# EAGLE board FRI6FC1IN365URC (EAGLE 7.5.0)
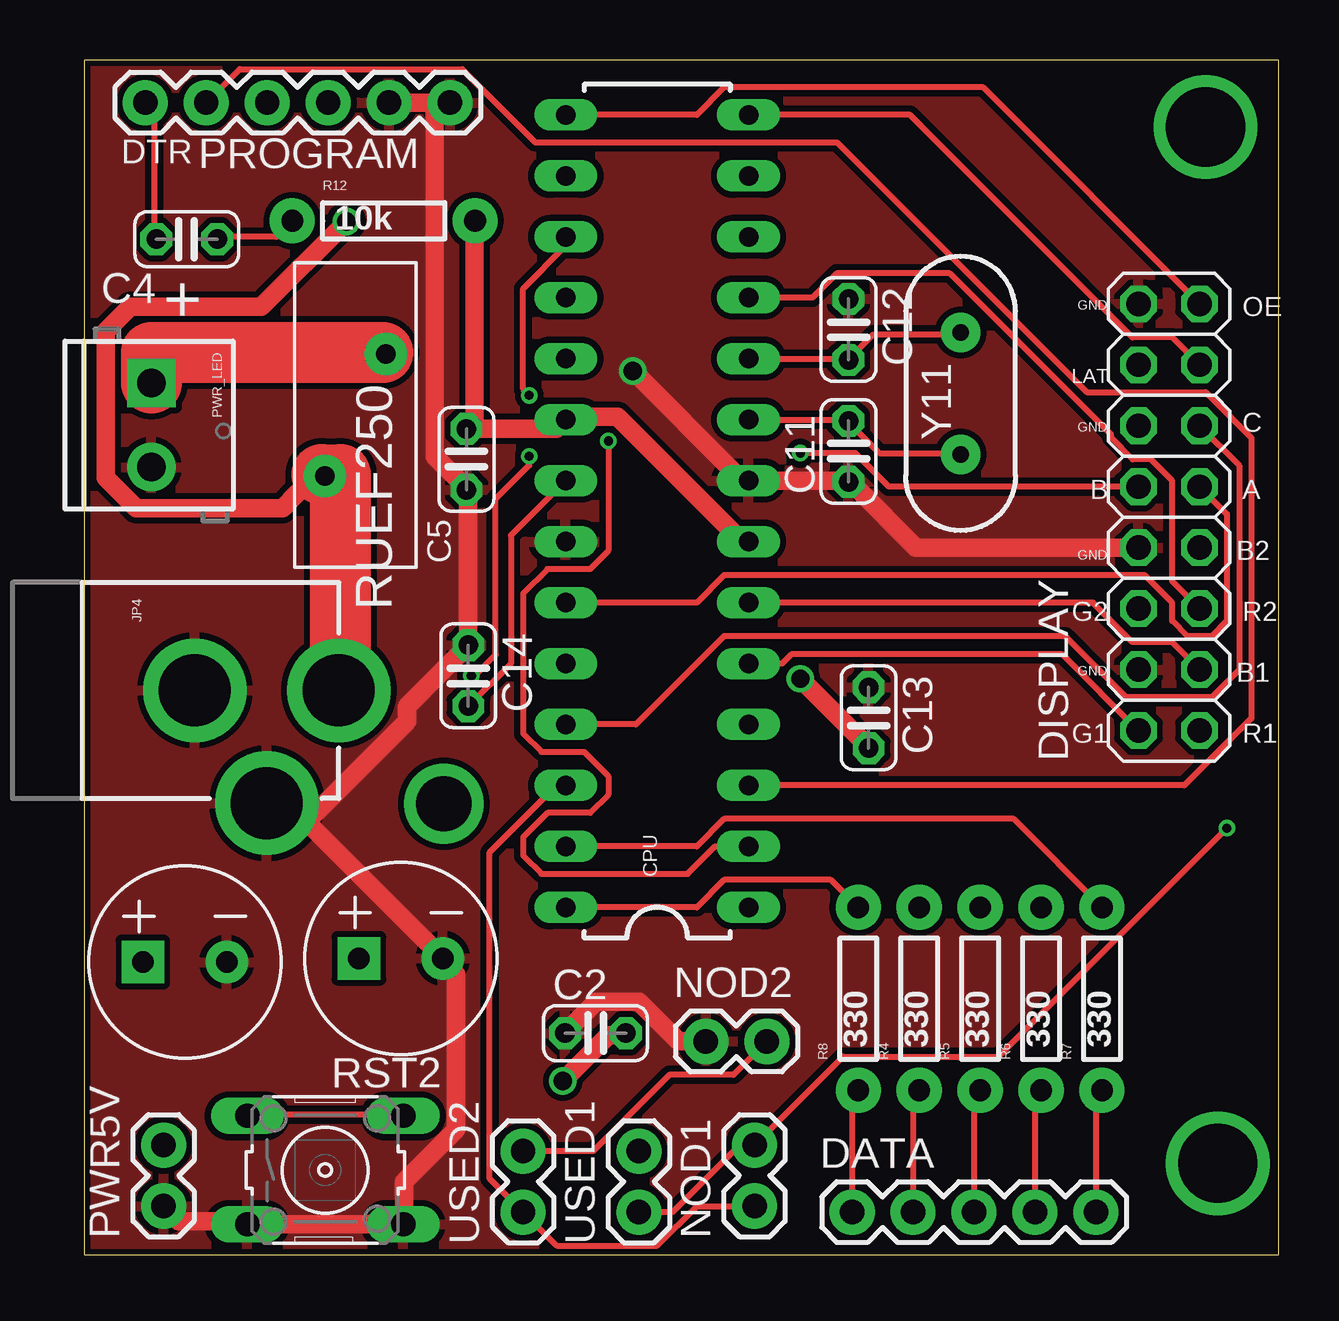
[diagram p0: board, top side]
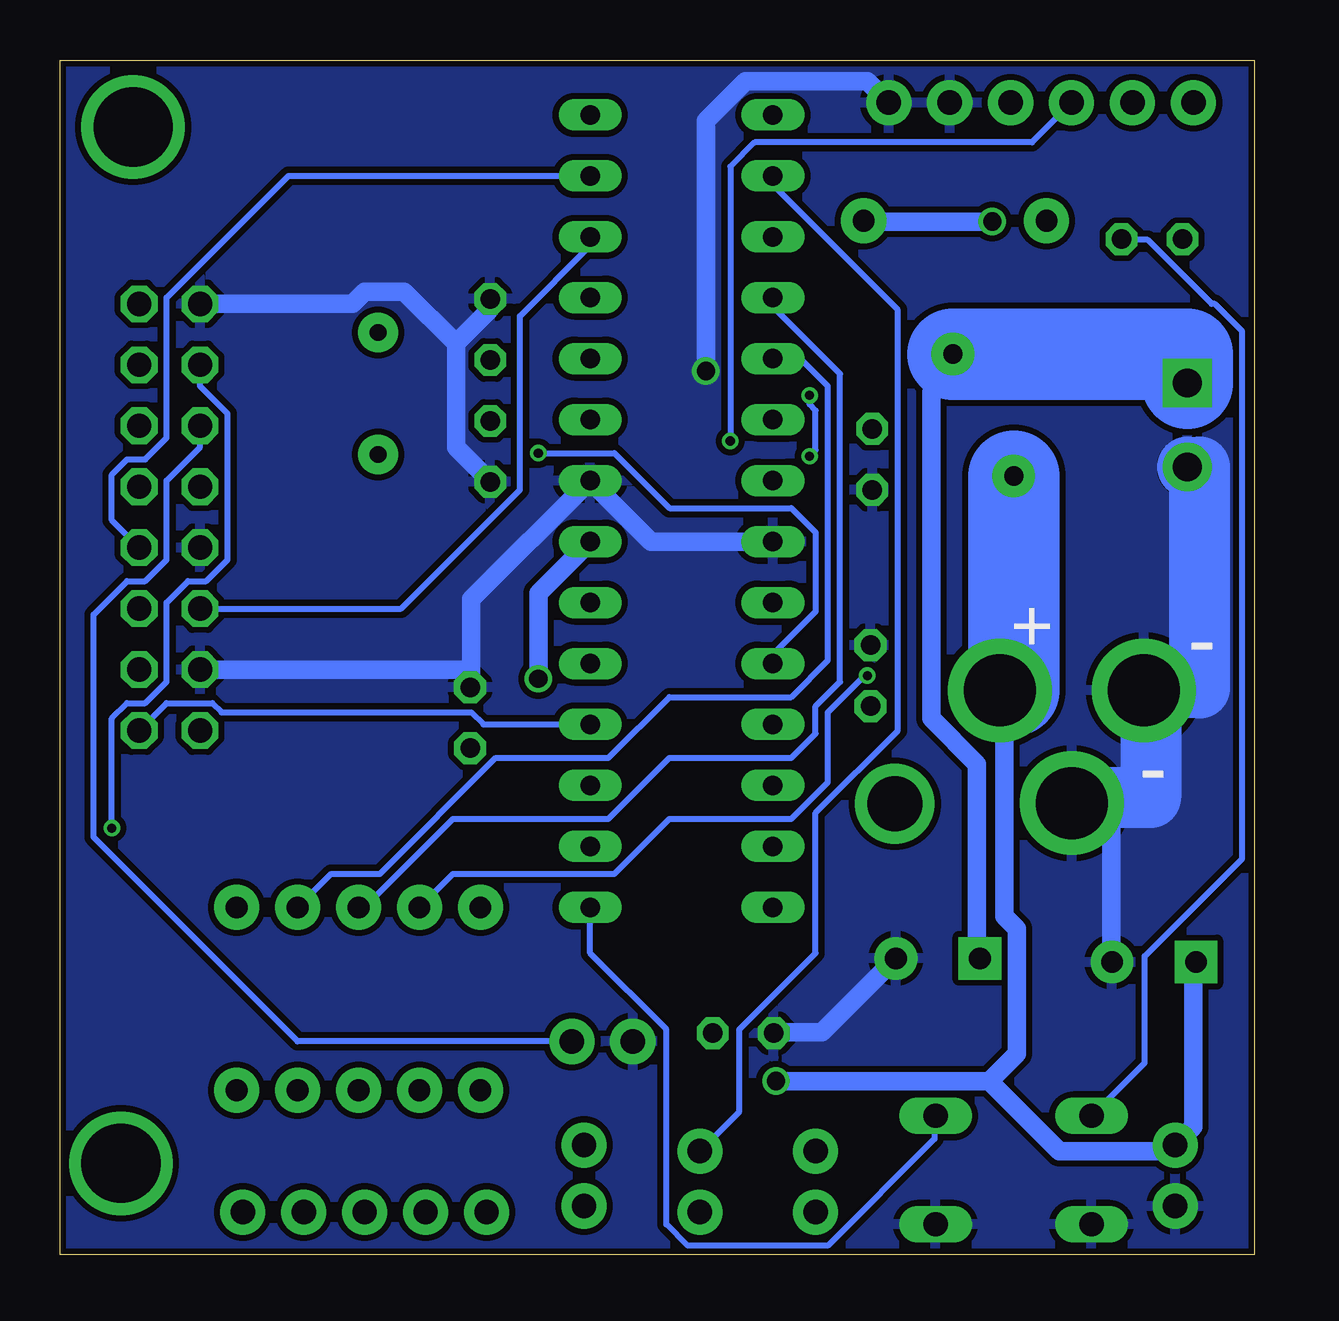
[diagram p1: board, bottom side, seen from below]

Size 49.78 x 49.78 mm. Coordinates in mm from the lower left corner, seen from the top.
Outline: 0,0 49.78,0 49.78,49.78 0,49.78 0,0
Copper layers (1*16): Top 0.035mm / dielectric 1.5mm / Bottom 0.035mm
Design rules "SeeedStudio_2layer_DRU_no_angle_20140221": minimum track width 6mil, minimum drill 12mil, track to track 6mil, track to pad 6mil, pad to pad 6mil, via to via 6mil, smd to smd 0mil, copper to edge 10mil, drill to drill 10mil, minimum pad ring 10mil, minimum via ring 6mil, stop-mask expansion 2mil, vias tented up to drill 100mil, thermal gap 10mil
Net classes: 0 default: width 0.254 mm, drill 0.381 mm, clearance 0.254 mm; 1 SUPPLY: width 0.762 mm, drill 0.762 mm, clearance 0.254 mm to class 0, clearance 0.254 mm; 2 SUPPLYP: width 0.762 mm, drill 0.762 mm, clearance 0.254 mm to class 0, clearance 0.254 mm to class 1, clearance 0.254 mm; 3 OSC: width 0.254 mm, drill 0.381 mm, clearance 0.381 mm to class 0, clearance 0.381 mm to class 1, clearance 0.381 mm to class 2, clearance 0.381 mm

## Footprints (pad centres in the part's own frame; a part is rotated, then mirrored left to right if it is on the bottom)
EEU-FR1C471B = drill 0.9 pad 1.778: MINUS 1.75,0 | drill 0.9 pad 1.778 square: PLUS -1.75,0
C025-024X044 = drill 0.813 octagon: 1 -1.27,0; 2 1.27,0
DIL28-3 = drill 0.813 long: 1 -16.51,-3.81; 2 -13.97,-3.81; 3 -11.43,-3.81; 4 -8.89,-3.81; 5 -6.35,-3.81; 6 -3.81,-3.81; 7 -1.27,-3.81; 8 1.27,-3.81; 9 3.81,-3.81; 10 6.35,-3.81; 11 8.89,-3.81; 12 11.43,-3.81; 13 13.97,-3.81; 14 16.51,-3.81; 15 16.51,3.81; 16 13.97,3.81; 17 11.43,3.81; 18 8.89,3.81; 19 6.35,3.81; 20 3.81,3.81; 21 1.27,3.81; 22 -1.27,3.81; 23 -3.81,3.81; 24 -6.35,3.81; 25 -8.89,3.81; 26 -11.43,3.81; 27 -13.97,3.81; 28 -16.51,3.81
1X05 = drill 1.016 pad 1.88: 1 0,0; 2 2.54,0; 3 5.08,0; 4 7.62,0; 5 10.16,0
2X08 = drill 1.016 octagon: 1 -8.89,-1.27; 2 -8.89,1.27; 3 -6.35,-1.27; 4 -6.35,1.27; 5 -3.81,-1.27; 6 -3.81,1.27; 7 -1.27,-1.27; 8 -1.27,1.27; 9 1.27,-1.27; 10 1.27,1.27; 11 3.81,-1.27; 12 3.81,1.27; 13 6.35,-1.27; 14 6.35,1.27; 15 8.89,-1.27; 16 8.89,1.27
POWER_JACK_PTH = drill 2.997 pad 4.318: GND 0,7.7; GNDBREAK 4.7,10.7; PWR 0,13.7
1X02 = drill 1.016 pad 1.88: 1 0,0; 2 2.54,0
1X06 = drill 1.016 pad 1.88: 1 0,0; 2 2.54,0; 3 5.08,0; 4 7.62,0; 5 10.16,0; 6 12.7,0
SCREWTERMINAL-3.5MM-2 = drill 1.2 pad 2.032 square: 1 0,0 | drill 1.2 pad 2.032: 2 3.5,0
AXIAL-0.3 = drill 0.9 pad 1.88: P$1 -3.81,0; P$2 3.81,0
B3F-10XX = drill 1.016 long: 1 -3.251,2.261; 2 3.251,2.261; 3 -3.251,-2.261; 4 3.251,-2.261
RUEF250U = drill 0.8 pad 1.778: P1 2.54,-1.27; P2 -2.54,1.27
HC49US = drill 0.7 pad 1.651: 1 -2.54,0; 2 2.54,0

## Placement (x,y rotation side)
C1  EEU-FR1C471B  [EEU-FR1C471B]  4.19,12.2 0 top
C2  100n  [C025-024X044]  21.31,9.23 0 top
C4  100n  [C025-024X044]  4.27,42.32 180 top
C5  100n  [C025-024X044]  15.93,33.15 90 top
C7  EEU-FR1C471B  [EEU-FR1C471B]  13.19,12.35 0 top
C11  22p  [C025-024X044]  31.85,33.48 90 top
C12  22p  [C025-024X044]  31.85,38.56 270 top
C13  100n  [C025-024X044]  32.69,22.38 270 top
C14  100n  [C025-024X044]  16,24.13 270 top
CPU  ATMEGA328P_PDIP  [DIL28-3]  23.88,30.99 90 top
DATA  [1X05]  32,1.78 0 top
DISPLAY  [2X08]  45.21,30.73 90 top
JP4  POWER_JACKPTH  [POWER_JACK_PTH]  -3.09,23.52 270 top
NOD1  [1X02]  27.94,2.03 90 top
NOD2  [1X02]  25.91,8.89 0 top
PROGRAM  [1X06]  2.54,48.01 0 top
PWR5V  [1X02]  3.3,2.03 90 top
PWR_LED  [SCREWTERMINAL-3.5MM-2]  2.79,36.32 270 top
R4  330  [AXIAL-0.3]  34.8,10.67 90 top
R5  330  [AXIAL-0.3]  37.34,10.67 90 top
R6  330  [AXIAL-0.3]  39.88,10.67 90 top
R7  330  [AXIAL-0.3]  42.42,10.67 90 top
R8  330  [AXIAL-0.3]  32.26,10.67 90 top
R12  10k  [AXIAL-0.3]  12.48,43.08 0 top
RST2  [B3F-10XX]  10.04,3.53 0 top
RUEF250  RUEF250U  [RUEF250U]  11.3,34.99 270 top
USED1  [1X02]  23.11,1.78 90 top
USED2  [1X02]  18.29,1.78 90 top
Y11  16MHz  [HC49US]  36.53,35.89 270 top

## Library data of the parts
C1 C7 RUEF250 = my
C2 C4 C5 C11-C14 = rcl
CPU = SparkFun-DigitalIC
DATA NOD1 NOD2 PROGRAM PWR5V USED1 USED2 = SparkFun-Connectors
DISPLAY = pinhead
JP4 = SparkFun-Connectors; PROD_ID: CONN-08197
PWR_LED = SparkFun-Connectors; PROD_ID: CONN-08399
R4-R8 R12 = SparkFun-Passives
RST2 = switch-omron; MPN: B3F-1000; OC_FARNELL: 176432; OC_NEWARK: 36M3542
Y11 = SparkFun-FreqCtrl

## Nets
5VPANEL [SUPPLYP]: C7.PLUS PWR_LED.1 RUEF250.P2
+5V [SUPPLYP]: C1.PLUS C2.2 C5.2 C13.2 CPU.7 CPU.20 JP4.PWR PWR5V.2 R12.P$2 RUEF250.P1
A: CPU.23 DISPLAY.9
A3: CPU.26 NOD1.1 USED2.1
B: CPU.24 DISPLAY.10
B1: CPU.6 DISPLAY.3
B2: CPU.13 DISPLAY.7
C: CPU.25 DISPLAY.11
CLK: CPU.14 DISPLAY.13
D: DISPLAY.12 NOD2.2 USED2.2
D10: CPU.16 USED1.2
DD1: DATA.1 R8.P$1
DD2: DATA.2 R4.P$1
DD3: DATA.3 R5.P$1
DD4: DATA.4 R6.P$1
DD5: DATA.5 R7.P$1
DTR1: C4.2 PROGRAM.1
G1: CPU.5 DISPLAY.2
G2: CPU.12 DISPLAY.6
GND [SUPPLY]: C1.MINUS C2.1 C5.1 C7.MINUS C11.1 C12.1 C13.1 C14.1 CPU.8 CPU.22 DISPLAY.4 DISPLAY.8 DISPLAY.16 JP4.GND JP4.GNDBREAK NOD2.1 PROGRAM.5 PROGRAM.6 PWR5V.1 PWR_LED.2 RST2.3 RST2.4
LAT: DISPLAY.14 NOD1.2 USED1.1
N$1 [OSC]: C11.2 CPU.9 Y11.2
N$2 [OSC]: C12.2 CPU.10 Y11.1
N$6: CPU.19 R6.P$2
N$7: CPU.18 R5.P$2
N$8: CPU.17 R4.P$2
N$10: CPU.27 R7.P$2
N$11: CPU.28 R8.P$2
N$14: C14.2 CPU.21
OE: CPU.15 DISPLAY.15
R1: CPU.4 DISPLAY.1
R2: CPU.11 DISPLAY.5
RST1: C4.1 CPU.1 R12.P$1 RST2.1 RST2.2
RX-I1: CPU.2 PROGRAM.3
TX-O1: CPU.3 PROGRAM.2

## Tracks (layer width: path | path; a pad name or v marks a point on that pad's centre or on a via)
5VPANEL
  Top 2.54: 12.45,37.59 2.79,37.59 PWR_LED.1
  Bottom 0.762: C7.PLUS 11.56,12.45 11.56,20.45 13.46,22.35 13.46,35.94 RUEF250.P2
  Bottom 3.81: RUEF250.P2 2.79,37.53 PWR_LED.1
+5V  (via drill 0.76)
  Top 0.762: CPU.7 27.43,29.72 22.23,34.92 20.32,34.92 CPU.20 19.68,34.42 C5.2 16.26,34.67 16.26,43.05 R12.P$2 | v29.84,24 32.64,21.21 C13.2 | 10.67,32.38 10.03,32.38 RUEF250.P1 | v19.94,7.24 21.84,9.14 22.48,9.14 C2.2 | v10.92,43.05 7.37,39.5 1.91,39.5 0.89,38.48 0.89,32.38 2.16,31.11 8.26,31.11 8.89,31.75 9.91,32.51
  Top 2.54: 9.91,32.51 10.67,32.51 10.67,32.38 10.67,23.62
  Bottom 0.762: v29.84,24 29.84,27.56 CPU.7 | 11.05,7.24 v19.94,7.24 | 11.05,7.24 8.13,4.32 3.56,4.32 PWR5V.2 2.54,5.33 2.54,12.19 C1.PLUS | 11.05,7.24 9.91,8.38 9.91,13.59 10.41,14.1 10.41,21.72 JP4.PWR | v10.92,43.05 16.26,43.05 R12.P$2
  Bottom 3.81: JP4.PWR 10.03,23.52 RUEF250.P1
A
  Top 0.254: CPU.23 25.53,27.18 26.67,28.32 44.2,28.32 45.34,27.18 45.34,26.42 45.97,25.78 46.99,25.78 47.62,26.42 47.62,30.86 DISPLAY.9
A3
  Top 0.254: CPU.26 19.68,19.56 16.89,16.76 16.89,3.17 USED2.1 19.68,0.38 23.88,0.38 25.53,2.03 NOD1.1
B  (via drill 0.38)
  Top 0.254: v29.84,33.4 32.13,33.4 33.53,32 DISPLAY.10
  Bottom 0.254: CPU.24 20.07,25.02 18.29,26.8 18.29,30.1 19.3,31.11 24.38,31.11 26.67,33.4 v29.84,33.4
B1
  Top 0.254: CPU.6 42.04,27.18 43.69,25.53 45.34,25.53 DISPLAY.3
B2
  Bottom 0.254: CPU.13 40.26,44.96 45.34,39.88 45.34,34.04 46.23,33.15 46.99,33.15 47.62,32.51 47.62,30.61 DISPLAY.7
C
  Top 0.254: CPU.25 22.99,22.1 26.67,25.78 40.89,25.78 43.43,23.24 46.99,23.24 48.13,24.38 48.13,32.89 DISPLAY.11
CLK
  Top 0.254: CPU.14 34.42,47.5 43.69,38.23 45.34,38.23 DISPLAY.13
D
  Top 0.254: USED2.2 21.21,4.32 24.38,7.49 27.05,7.49 NOD2.2
  Bottom 0.254: DISPLAY.12 43.94,33.66 45.34,32.26 45.34,28.96 46.23,28.07 46.99,28.07 48.39,26.67 48.39,17.4 39.88,8.89 NOD2.2
D10
  Bottom 0.254: CPU.16 20.07,44.58 14.86,39.37 14.86,21.84 18.29,18.41 18.29,12.57 21.46,9.4 21.46,5.97 USED1.2
DD1
  Top 0.254: DATA.1 32,6.6 R8.P$1
DD2
  Top 0.254: DATA.2 34.54,6.6 R4.P$1
DD3
  Top 0.254: DATA.3 37.08,6.6 R5.P$1
DD4
  Top 0.254: DATA.4 39.62,6.6 R6.P$1
DD5
  Top 0.254: DATA.5 42.16,6.6 R7.P$1
DTR1
  Top 0.254: PROGRAM.1 2.92,47.62 2.92,42.42 C4.2
G1
  Top 0.254: CPU.5 29.08,24.64 29.46,25.02 40.77,25.02 DISPLAY.2
G2
  Bottom 0.254: CPU.12 27.69,42.04 30.61,39.12 30.61,31.88 35.56,26.92 DISPLAY.6
GND  (via drill 0.76)
  Top 0.762: DISPLAY.8 34.67,29.46 32.13,32 C11.1 31.75,32.26 CPU.8 27.43,32.51 27.18,32.51 v22.86,36.83 | PROGRAM.5 PROGRAM.6 14.61,47.75 14.61,33.27 15.75,32.13 C5.1 16,31.88 C14.1 13.46,22.86 13.46,22.23 9.53,18.29 JP4.GNDBREAK 7.62,18.8 8.51,18.8 14.86,12.45 C7.MINUS 15.11,12.06 15.49,11.68 15.49,5.21 13.34,3.05 13.34,1.65 RST2.4 13.21,1.27 7.11,1.27 RST2.3 6.73,1.4 3.94,1.4 PWR5V.1 | NOD2.1 24.77,8.89 23.11,10.54 21.34,10.54 20.07,9.27 C2.1
  Bottom 0.762: CPU.22 25.15,29.72 CPU.8 32.64,27.3 32.64,24.38 | 33.27,37.97 31.88,39.37 31.88,39.75 C12.1 | 33.27,37.97 33.27,33.66 31.88,32.26 C11.1 | 32.64,24.38 32.64,23.75 C13.1 | 32.64,24.38 DISPLAY.4 | DISPLAY.16 37.59,39.62 37.08,40.13 35.43,40.13 33.27,37.97 | C1.MINUS 5.97,12.32 5.97,17.91 JP4.GNDBREAK | C2.1 19.94,9.27 18.03,9.27 14.99,12.32 C7.MINUS | v22.86,36.83 22.86,47.24 21.21,48.9 16.13,48.9 PROGRAM.6
  Bottom 2.54: PWR_LED.2 2.29,32.82 2.29,23.62 4.61,23.62 JP4.GND 4.32,23.52 4.32,19.05 7.61,19.05 JP4.GNDBREAK
  pour Bottom: 0,49.78 49.78,49.78 49.78,0 0,0
  pour Top: 0,49.78 49.78,49.78 49.78,0 0,0
LAT  (via drill 0.38)
  Top 0.254: v47.62,17.78 38.1,8.26 31.62,8.26 NOD1.2 27.3,4.57 24.51,1.78 USED1.1
  Bottom 0.254: DISPLAY.14 43.94,36.2 42.8,35.05 42.8,28.96 43.69,28.07 44.45,28.07 45.34,27.18 45.34,23.88 46.23,22.99 46.99,22.99 47.62,22.35 v47.62,17.78
N$1
  Top 0.254: CPU.9 31.75,34.8 C11.2 31.88,34.67 33.15,33.4 36.45,33.4 Y11.2
N$2
  Top 0.254: CPU.10 31.75,37.34 C12.2 31.88,37.34 32.89,38.35 36.45,38.35 Y11.1
N$3  (via drill 2.3)
  other vias: 14.99,18.8
N$4  (via drill 3.3)
  other vias: 46.74,46.99
N$6
  Bottom 0.254: CPU.19 18.92,37.34 17.78,36.2 17.78,24.77 19.3,23.24 24.38,23.24 26.92,20.7 31.62,20.7 36.45,15.88 38.48,15.88 R6.P$2
N$7
  Bottom 0.254: CPU.18 20.07,39.5 17.27,36.7 17.27,23.88 18.29,22.86 18.29,21.72 19.3,20.7 24.38,20.7 26.92,18.16 33.4,18.16 37.08,14.48 R5.P$2
N$8  (via drill 0.38)
  Top 0.254: CPU.17 20.07,42.04 18.29,40.26 18.29,36.07 v18.54,35.81 | v18.54,33.27 18.54,32.89 17.14,31.5 17.14,25.02 16.26,24.13 v16.13,24.13
  Bottom 0.254: v18.54,35.81 18.54,35.43 18.29,35.18 18.29,33.53 v18.54,33.27 | v16.13,24.13 16.26,24.13 17.78,22.61 17.78,19.68 19.3,18.16 24.38,18.16 26.67,15.88 33.4,15.88 R4.P$2
N$10
  Top 0.254: CPU.27 25.53,17.02 26.67,18.16 38.73,18.16 R7.P$2
N$11
  Top 0.254: CPU.28 25.53,14.48 26.67,15.62 31.11,15.62 R8.P$2
N$14
  Top 0.254: C14.2 17.78,24.64 17.78,29.97 CPU.21
NC1  (via drill 3.3)
  other vias: 47.24,3.81
OE
  Top 0.254: CPU.15 25.53,47.5 26.67,48.64 37.47,48.64 DISPLAY.15
R1
  Bottom 0.254: CPU.4 32.13,22.1 32.64,22.61 43.05,22.61 43.43,22.99 45.34,22.99 DISPLAY.1
R2
  Top 0.254: CPU.11 30.35,39.88 31.37,40.89 36.07,40.89 42.8,34.16 42.8,34.04 43.69,33.15 44.45,33.15 45.34,32.26 45.34,28.07 DISPLAY.5
RST1
  Top 0.254: C4.1 5.59,42.42 8,42.42 8.64,43.05 R12.P$1 | RST2.1 6.86,5.84 13.21,5.84 RST2.2
  Bottom 0.254: CPU.1 27.69,12.57 24.51,9.4 24.51,1.27 23.62,0.38 17.78,0.38 13.34,4.83 13.34,5.71 RST2.2 | C4.1 5.46,42.29 4.45,42.29 1.78,39.62 1.65,39.62 0.51,38.48 0.51,16.51 4.57,12.45 4.57,8 6.73,5.84 RST2.1
RX-I1  (via drill 0.38)
  Top 0.254: CPU.2 26.29,17.02 25.15,15.88 19.05,15.88 18.29,16.64 18.29,17.4 19.3,18.41 21.08,18.41 21.84,19.18 21.84,19.94 20.83,20.95 19.05,20.95 18.29,21.72 18.29,27.56 19.3,28.57 21.08,28.57 21.84,29.34 v21.84,33.91
  Bottom 0.254: v21.84,33.91 21.84,45.34 20.83,46.35 9.27,46.35 PROGRAM.3
TX-O1
  Top 0.254: CPU.3 45.85,19.56 48.64,22.35 48.64,34.04 46.74,35.94 41.78,35.94 31.37,46.35 18.8,46.35 15.75,49.4 6.48,49.4 PROGRAM.2

## Text on the board
tPlace: DTR | + | GND | OE | LAT | GND | C | B | A | GND | B2 | G2 | R2 | GND | B1 | G1 | R1
bPlace: + | - | -